# Altium PCB Motor PCB.PcbDoc
Units mil, origin at the board's own origin, x right, y up, seen from the top; angles counter-clockwise.
Board outline 629.96 x 1250 mil, 4 copper layers (Top Layer, Ground, Power, Bottom Layer), stack 29.8 mil thick; 19 components, 14 nets, 55 pads, 31 vias.
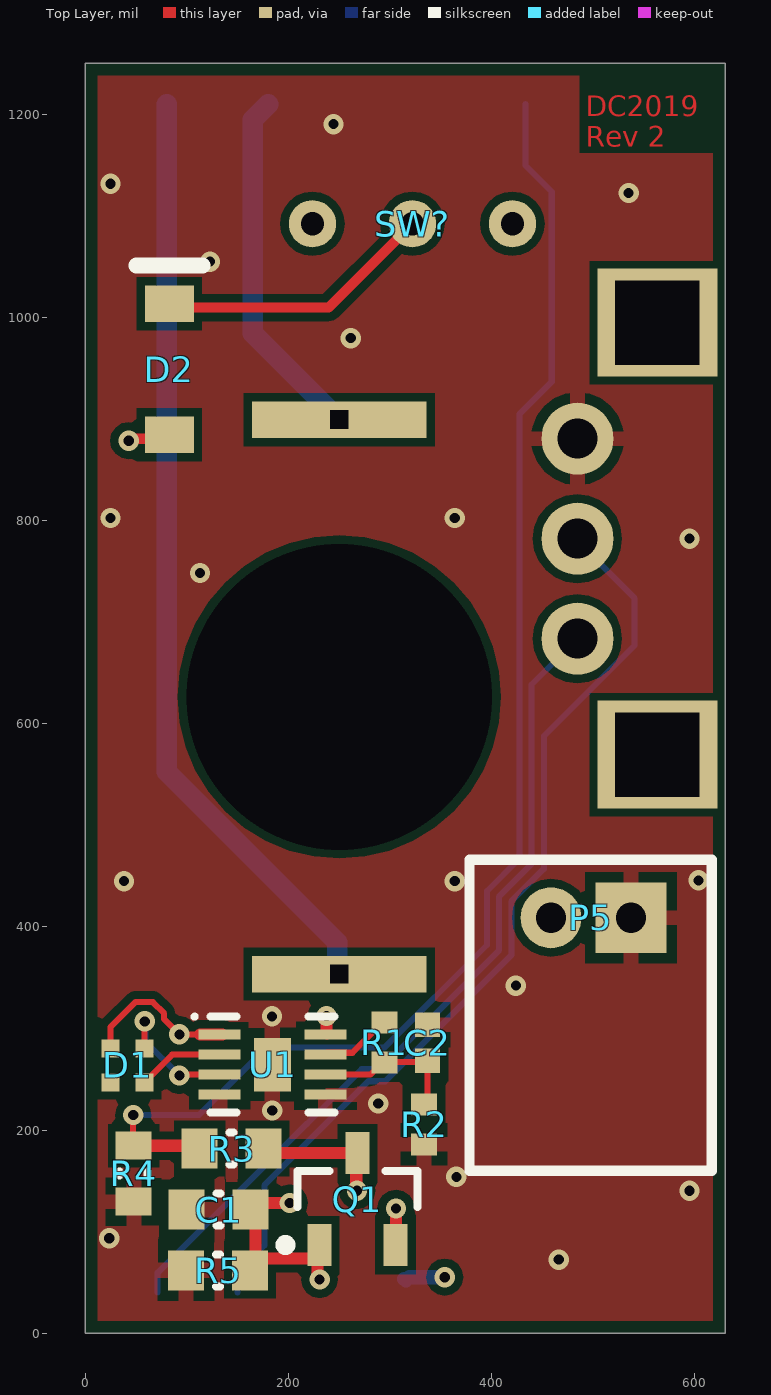
[diagram p0: Top Layer view]
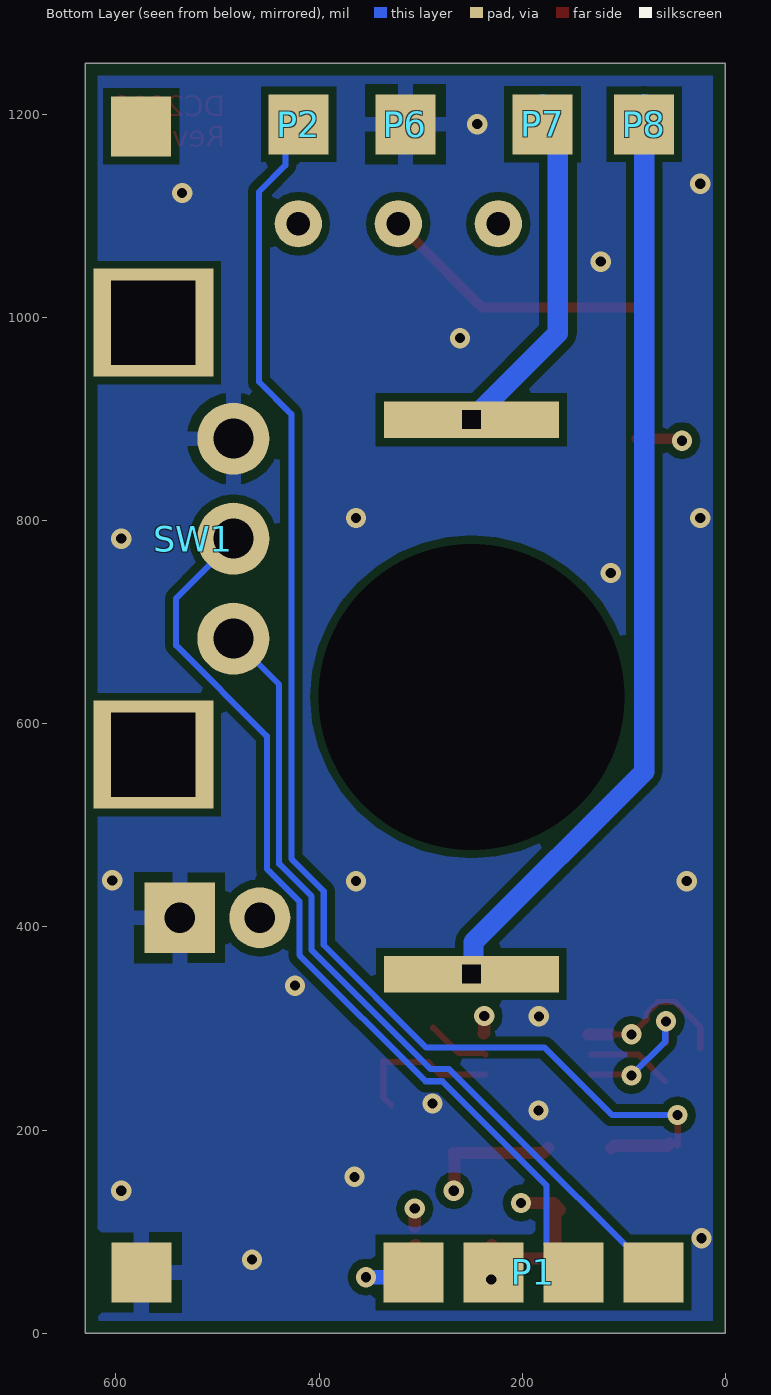
[diagram p1: Bottom Layer view, seen from below]
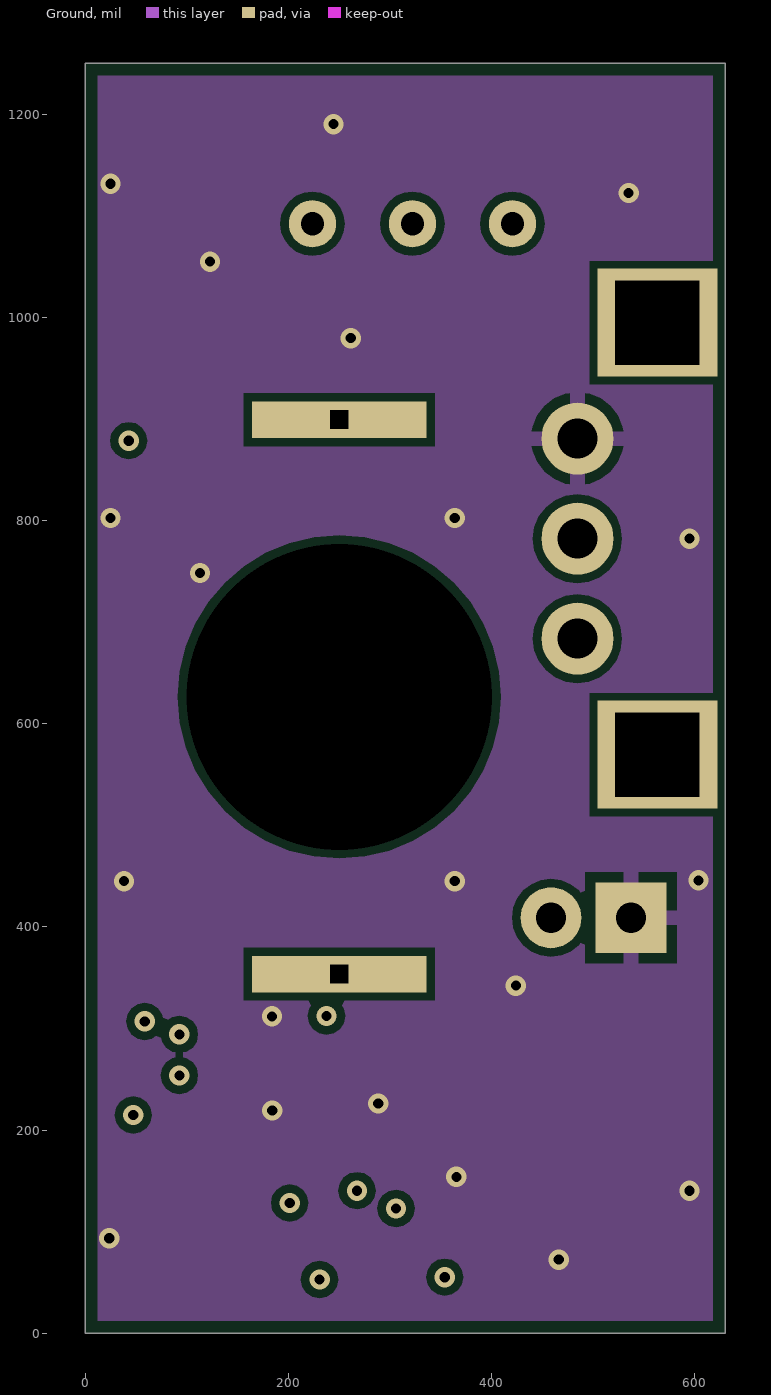
[diagram p2: Ground]
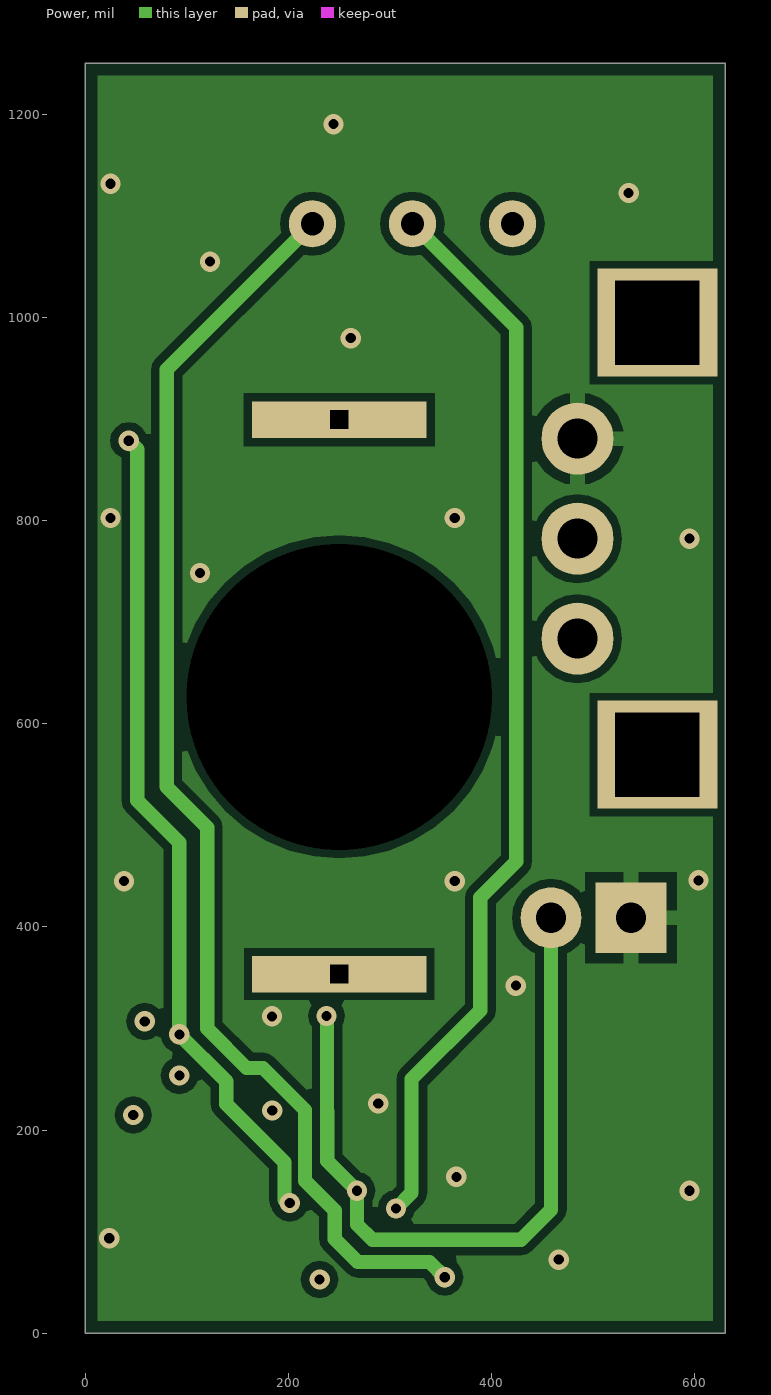
[diagram p3: Power]

## Layer stack, top to bottom
Top Solder: solder mask 0.4, Solder Resist, Dk 3.5
Top Layer: signal copper 1.4
Dielectric 2: prepreg 5.6, PP-006, Dk 4.1
Ground: signal copper 1.4
Dielectric 1: dielectric 13, FR-4, Dk 4.8
Power: signal copper 1.4
Dielectric 3: prepreg 5.6, PP-006, Dk 4.1
Bottom Layer: signal copper 1.4
Bottom Solder: solder mask 0.4, Solder Resist, Dk 3.5

## Board outline
0,0 0,1250 629.96,1250 629.96,0

## Design rules (kind name [scope] priority, off if disabled: settings)
BoardOutlineClearance [All] p1: gap=12 ignorepadtopadclearanceinfootprint=FALSE
Clearance [All] p1: gap=6 ignorepadtopadclearanceinfootprint=FALSE except(8: Arc-Fill Arc-Poly Arc-Region Track-Fill Track-Poly Track-Region SMDPad-Fill SMDPad-Poly SMDPad-Region THPad-Fill THPad-Poly THPad-Region Via-Fill Via-Poly Via-Region Fill-Fill Fill-Poly Fill-Region Poly-Poly Poly-Region Region-Region)
DiffPairsRouting [All] p1: maxlimit=10 minlimit=6 mostfreqgap=6 toplayer_minwidth=6 toplayer_maxwidth=15 toplayer_prefwidth=8 midlayer1_minwidth=6 midlayer1_maxwidth=15 midlayer1_prefwidth=8 midlayer2_minwidth=6 midlayer2_maxwidth=15 midlayer2_prefwidth=8 bottomlayer_minwidth=6 bottomlayer_maxwidth=15 bottomlayer_prefwidth=8 maxuncoupledlength=500
HoleSize [All] p1: absolutevalues=TRUE maxlimit=400 minlimit=7.87 maxpercent=80.000 minpercent=20.000
HoleToHoleClearance [All] p1: gap=18 allowstackedmicrovias=TRUE
MinimumAnnularRing [All] p1: minimumring=5
MinimumSolderMaskSliver [All] p1 off: minsoldermaskwidth=6
PlaneClearance [All] p1: clearance=12
PlaneConnect PlaneConnect_IsVia [IsVia] p1: planeconnectstyle=Direct reliefexpansion=20 reliefentries=4 reliefconductorwidth=10 reliefairgap=10
PlaneConnect [All] p2: planeconnectstyle=Relief reliefexpansion=20 reliefentries=4 reliefconductorwidth=15 reliefairgap=12
PolygonConnect PolygonConnect_IsVia [IsVia] p1: connectstyle=Direct reliefconductorwidth=10 reliefentries=4 polygonreliefangle="45 Angle" airgapwidth=10
PolygonConnect [All] p2: connectstyle=Relief reliefconductorwidth=15 reliefentries=4 polygonreliefangle="90 Angle" airgapwidth=10
RoutingVias [All] p1: holewidth=7.87 width=14.17 viastyle="Through Hole" minholewidth=7.87 minwidth=13.78 maxholewidth=28 maxwidth=50
SilkToSilkClearance [All] p1 off: silktosilkclearance=6
SilkToSolderMaskClearance [IsPad] p1 off: minsilkscreentomaskgap=6 clearancetoexposedcopper=TRUE
SolderMaskExpansion [Not IsVia] p1: expansion=4
Width [All] p1: maxlimit=50 minlimit=4 preferedwidth=6
22 further rules are at their usual default settings.

## Components (designator, comment, footprint, x,y, rotation, side; value= is the part's Value field where it differs from the comment)
C1 "CAP 1uF 16V 0603(1608)" CAPC0603(1608)100_N 131.21,121.77 r0 top value=1uF
C2 "CAP 100nF 6.3V 0402(1005)" CAPC0402(1005)60_N 336.73,286.07 r270 top value=100nF
D1 "0402 RGB LED" "0404 RGB LED" 41.51,263.75 r0 top
D2 "DSS16UTR" MCC-SOD-123FL_V 82.73,948.9 r90 top
P1 "4p SMD Pads" "4p SMD pad" 70.87,40.28 r90 bottom
P2 "1p SMD Pads" "1p SMD pad"#1 421.85,1217.38 r0 top
P5 "S2B-PH-K-S" S2B-PH-K-S 537.03,409.03 r180 top
P6 "1p SMD Pads" "1p SMD pad"#2 103.72,1160.26 r180 bottom
P7 "1p SMD Pads" "1p SMD pad"#3 400.62,1155.85 r0 top
P8 "1p SMD Pads" "1p SMD pad"#4 59.21,1187.68 r0 top
Q1 "BSS314PE" INF-PG-SOT23_N 267.74,132.25 r90 top
R1 "Jumper 0402(1005)" RESC0402(1005)_N 294.31,286.08 r270 top value="0.00 Ohm"
R2 "Jumper 0402(1005)" RESC0402(1005)_N 333.38,205.74 r90 top value="0.00 Ohm"
R3 "100K 5% 0603(1608)" RESC0603(1608)_N 144.02,181.94 r180 top value="100000.00 Ohm"
R4 "360K 5% 0603(1608)" RESC0603(1608)_L 47.55,157.16 r90 top value="360000.00 Ohm"
R5 "1M 5% 0603(1608)" RESC0603(1608)_N 130.54,61.8 r0 top value="1000000.00 Ohm"
SW1 "9mm Encoder" "9mm encoder" 484.36,782.2 r90 bottom locked
SW? "SS12D00" "DC2019 Switch" 420.35,1092.13 r180 top
U1 "MC34674AEP/R2" SON50P300X65_HS-9N 184.23,264.44 r0 top

## Footprints (in the part's own frame and the unit in brackets; to place one, negate y for a bottom-side part, rotate by r counter-clockwise, add the part's x,y. Pads: shape width x height; smd on the part's side, far side on the other; paste and mask are expansions set on the pad)
"1p SMD pad"#1 [mm]
  rect 1.5x1.5 smd far side: 1(-0.046,-0.696)
"1p SMD pad"#2 [mm]
  rect 1.5x1.5 smd: 1(-5.365,0.755)
"1p SMD pad"#3 [mm]
  rect 1.5x1.5 smd far side: 1(-5.605,0.867)
"1p SMD pad"#4 [mm]
  rect 1.5x1.5 smd far side: 1(0.527,0.059)
"4p SMD pad" [mm]
  rect 1.5x1.5 smd: 1(0.501,0) 2(0.501,2) 3(0.501,4) 4(0.501,6)
"9mm encoder" [mm]
  round 1.8 hole 1: 1(-2.5,0) 2(0,0) 3(2.5,0)
  rect 2.7x3 hole 2.1 square: 5(-5.4,2) 5(5.4,2)
  body extent -5.75,-1.63 5.75,4.47, height 12.57
"0404 RGB LED" [mm] "0404 RGB LED"
  rect 0.45x0.45 smd: 1(-0.425,0.425) 2(0.425,0.425) 3(0.425,-0.425) 4(-0.425,-0.425)
  body extent -0.5,-0.5 0.5,0.5, height 0.52
CAPC0402(1005)60_N [mm] "Chip Capacitor, Body 1.0x0.5mm, Height 0.6mm, IPC Medium Density"
  rect 0.62x0.62 smd: 1(-0.45,0) 2(0.45,0)
  body extent -0.55,-0.3 0.55,0.3, height 0.6
CAPC0603(1608)100_N [mm] "Chip Capacitor, Body 1.6x0.8mm, Height 1.0mm, IPC Medium Density"
  rect 0.9x1 smd: 1(-0.8,0) 2(0.8,0)
  silkscreen extent -0.05,-0.4 0.05,0.4, body extent -0.87,-0.48 0.88,0.47, height 1
"DC2019 Switch" [mm]
  round 1.183 hole 0.583: 1(0,0) 2(2.5,0) 3(5,0)
  body extent -1.75,-1.85 6.75,1.85, height 3.5
INF-PG-SOT23_N [mm] "SOT23, 3-Leads, Body 2.9x1.3mm, Pitch 0.95mm, IPC Medium Density"
  rect 1.05x0.6 smd: 1(-1.15,0.95) 2(-1.15,-0.95) 3(1.15,0)
  silkscreen extent -1.27,-1.5 0.7,1.92, body extent -0.7,-1.5 0.7,1.5, height 1.1
MCC-SOD-123FL_V [mil] "SODFL, 2-Leads, Body 3.1x1.9mm"
  rect 36x48 smd: 1(-64.5,0) 2(64.5,0)
  silkscreen extent 102,-32 102,32, body extent -73,-37 73,37, height 47
RESC0402(1005)_N [mm] "Chip Resistor, Body 1.0x0.5mm, IPC Medium Density"
  rect 0.55x0.65 smd: 1(-0.5,0) 2(0.5,0)
  body extent -0.52,-0.27 0.53,0.28, height 0.4
RESC0603(1608)_L [mm] "Chip Resistor, Body 1.6x0.8mm, IPC High Density"
  rect 0.7x0.9 smd: 1(-0.7,0) 2(0.7,0)
  silkscreen extent -0.05,-0.35 0.05,0.35, body extent -0.85,-0.47 0.85,0.47, height 0.6
RESC0603(1608)_N [mm] "Chip Resistor, Body 1.6x0.8mm, IPC Medium Density"
  rect 0.9x1 smd: 1(-0.8,0) 2(0.8,0)
  silkscreen extent -0.05,-0.4 0.05,0.4, body extent -0.85,-0.47 0.85,0.47, height 0.6
S2B-PH-K-S [mil] "JST Right Angle 2 Ckt"
  rect 69.61x69.61 hole 30: 1(0,0)
  round 60 hole 30: 2(78.74,0)
  silkscreen extent -80,-57 159,249, body extent -77,-53 156,246, height 190
SON50P300X65_HS-9N [mm] "SON, 8-Leads, Body 2.00x3.00mm, Pitch 0.50mm, Thermal Pad 1.33x0.93mm, IPC Medium Density"
  rect 1.05x0.25 smd paste-0.012: 1(-1.32,0.75) 2(-1.32,0.25) 3(-1.32,-0.25) 4(-1.32,-0.75) 5(1.32,-0.75) 6(1.32,-0.25) 7(1.32,0.25) 8(1.32,0.75)
  rect 0.93x1.33 smd paste-0.012: 9(0,0)
  silkscreen extent -2,-1.2 1.55,1.25, body extent -1.55,-1.05 1.55,1.05, height 0.65

## Part data
C1: library part CMP-1035-02736-1, "CAP 1uF 16V ±5% 0603 (1608 Metric) Thickness 1mm SMD", Case-EIA=0603, Case-Metric=1608, Rated Voltage="16 V", Tolerance=±5%, Max Thickness="1 mm", Technology=SMT
C2: library part CMP-1034-02061-1, "CAP 100nF 6.3V ±10% 0402 (1005 Metric) Thickness 0.6mm SMD", Case-EIA=0402, Case-Metric=1005, Rated Voltage="6.3 V", Tolerance=±10%, Max Thickness="0.6 mm", Technology=SMT
D2: library part CMP-2000-07084-1, "SCHOTTKY 60V SOD-123FL", Forward Current If(AV)=1A, Forward Surge Current Ifsm Max=30A, Forward Voltage VF Max=1.1V, Manufacturer="Micro Commercial Components", Package Description="2-Pin Small Outline Diode, Flat Lead, Body 2.825 x 1.65 mm", Package Reference=SOD-123FL, Repetitive Reverse Voltage Vrrm Max=1kV, Datasheet URL=http://www.mccsemi.com/up_pdf/SM4001PL-SM4007PL(SOD-123FL).PDF, Datasheet Version="Rev. H, 05/2015", Diode Configuration=Single, Diode Type=StandardRecovery, Manufacturer URL=http://www.mccsemi.com/, Mounting Technology=SurfaceMount
P1: library part "4p SMD"
P2 P6 P7 P8: library part "1p SMD"
P5: "JST Right-Angle 2 ckt"
Q1: library part CMP-1099-00027-1, "P-Channel OptiMOS P3 Small-Signal-Transistor, -30 V VDS, -1.5 A ID, -55 to 150 degC, PG-SOT23, Reel, Green", Manufacturer=Infineon, ComponentLink1Description="Manufacturer URL", ComponentLink1URL=http://www.infineon.com/, ComponentLink2Description=Datasheet, ComponentLink2URL=http://www.infineon.com/dgdl/BSS314PE_rev2.3.pdf?folderId=db3a304314dca38901154a72e3951a65&fileId=db3a304330f68606013109b696aa0084, ComponentLink3Description="Package Specification", ComponentLink3URL=http://www.infineon.com/dgdl/SOT23-Package_Overview.pdf?folderId=db3a30431936bc4b0119532290053c66&fileId=db3a30431936bc4b0119533468123c85, DatasheetVersion="Rev. 2.3", Green=TRUE, Halogen-free=TRUE, ID (max)="-1.5 A", IDpuls (max)="-6.1 A", Mounting Technology="Surface Mount", PackageDescription="3-Pin Small Outline Transistor Package, 2.9 x 1.3 mm Body, 0.95 mm Pitch", PackageReference=PG-SOT23, PackageVersion=Apr-08, Packing=Reel, PartNumber=BSS314PE, Pto t (max)="0.5 W", QG="-2.9 nC", RDS (on) (max)="140 mOhm", RDS (on) (max) (@4.5V)="230 mOhm", Rth="250 K/W", VDS (max)="-30 V", VGS(th) (max)="-2 V", VGS(th) (min)="-1 V"
R1 R2: library part CMP-1011-00001-1, "Jumper 0402 (1005 Metric)", Case-EIA=0402, Case-Metric=1005, Power=None, Technology=SMT, Tolerance=None
R3: library part CMP-1012-00122-1, "100K 0.1W 5% 0603 (1608 Metric)  SMD", Case-EIA=0603, Case-Metric=1608, Power="0.1 W", Tolerance="5 %", Technology=SMT
R4: library part CMP-1012-00135-1, "360K 0.1W 5% 0603 (1608 Metric)  SMD", Case-EIA=0603, Case-Metric=1608, Power="0.1 W", Tolerance="5 %", Technology=SMT
R5: library part CMP-1012-00146-1, "1M 0.1W 5% 0603 (1608 Metric)  SMD", Case-EIA=0603, Case-Metric=1608, Power="0.1 W", Tolerance="5 %", Technology=SMT
SW?: library part "DC2019 Switch"
U1: "High Input Voltage 1.05A Charger for Single-cell Li-Ion Batteries"

## Free pads (board coordinates)
  rect 172x36 hole 18 square: 1(249.95,899.35) 2(249.95,353.65)
  round 60 hole 301: 4(249.95,626.45)
  rect 59.06x59.06 smd far side: 5(574.8,60) 5(575,1188)

## Via types
v1: diameter 20, hole 10, Top Layer to Bottom Layer, tented both sides, 31 vias

## Nets (pads, with @x,y where several pads share a name; then routed paths per layer and width w, separated by ;. In a path a pad name is that pad's centre, name@x,y a point inside that pad or via, vN(x,y) a via of type N, cw(c..) or ccw(c..) an arc to the next point about the centre after c; other vN are vias at no path point)
BAT_CHG: P5.2 Q1.3 R3.1 U1.8 | length 865.4
  Top Layer w12: R3.1@174.33,182.64 179.45,177.52 Q1.3 266.63,176.41 266.63,141.21 v1(267.4,140.44) ; v1@237.31,314.71 v1(237.31,312.4) 237.31,295.65 U1.8@237.92,295.05
  Power w14: v1@237.78,309.62 237.92,309.48 237.92,259.91 ; 237.89,218.56 237.89,259.94 ; 238.06,218.56 238.06,169.78 v1(267.4,140.44) ; v1@266.01,140.67 267.4,139.29 267.4,107.26 282.5,92.16 428.77,92.16 458.29,121.68 P5.2
BAT_MON: P2.1 R3.2 R4.2 | length 1372.3
  Top Layer w6: v1(47.13,214.89) 46.91,214.67 46.91,185.35 R4.2
  Top Layer w12: R4.2@54.9,186.91 57.09,184.72 109.75,184.72 R3.2
  Bottom Layer w6: v1(47.13,214.89) 111.57,214.89 177.98,281.3 294.33,281.3 395.29,382.27 395.29,435.13 427.24,467.07 427.24,904.83 459.06,936.65 459.06,1123.57 433.07,1149.56 P2.1@433.07,1209.72
GND: C1.1 C2.1 P5.1 P6.1 pad.5@574.8,60 R2.1 R4.1 R5.1 SW1.3 U1.4 U1.5 U1.9
  other v1: 465.91,72.54 23.53,93.69 594.58,140.44 365.14,154.06 183.99,219.42 288.22,226.25 183.6,312.04 423.7,342.23 38.09,445.1 363.6,445.1 603.49,445.89 112.79,748.34 594.58,782.2 24.78,802.6 363.6,802.6 261.26,979.56 122.67,1054.9 534.71,1122.43 24.78,1131.5 244.24,1190.18
MOTOR_OUT_A: P7.1 pad.1 | length 351.8
  Bottom Layer w20: P7.1@179.96,1209.72 164.9,1194.66 164.9,984.4 pad.1
MOTOR_OUT_B: P8.1 pad.2 | length 926.5
  Bottom Layer w20: P8.1@79.96,1209.72 P8.1 79.96,552.89 248.03,384.82 248.03,355.46 249.84,353.65 pad.2
NetC2_2: C2.2 R1.2 R2.2 U1.6 | length 151.6
  Top Layer w6: U1.6 280.54,254.6 290.6,264.65 R1.2@290.6,265.8 ; R1.2@292.46,267.28 335.66,267.28 C2.2 336.73,231.94 R2.2@329.11,224.31
NetD1_2: D1.2 U1.3 | length 128.8
  Top Layer w6: v1(58.44,307.09) 58.34,307 58.34,286.34 58.61,286.07 D1.2@58.81,286.07 ; v1(92.48,253.89) 97.13,253.89 97.84,254.6 U1.3
  Bottom Layer w6: v1(58.44,307.09) 59.18,306.35 59.18,287.19 v1(92.48,253.89)
NetD1_3: D1.3 U1.2 | length 83.5
  Top Layer w6: D1.3@59.55,248.33 85.51,274.28 U1.2
NetP1_4: P1.4 SW?.3 | length 1305.5
  Power w14: SW?.3 80.02,948.65 80.02,537.91 119.92,498.01 119.92,299.99 158.67,261.23 174.7,261.23 216.08,219.85 216.08,150.19 245.4,120.88 245.4,92.91 268.04,70.27 338.75,70.27 v1(353.71,55.31) v1@353.71,52.15
  Bottom Layer w14: P1.4@313.9,53.64 315.62,51.92 319.01,55.31 v1(353.71,55.31)
NetR1_1: R1.1 U1.7 | length 62.4
  Top Layer w6: U1.7 238.12,276.2 262.78,276.2 287.34,300.77 R1.1@287.62,300.77
UI_ENC_SIGA: P1.2 SW1.2 | length 931.2
  Bottom Layer w6: P1.2@149.61,40.28 P1.2 176.13,86.53 176.13,145.65 278.64,248.16 295.13,248.16 419.29,372.33 419.29,425.19 451.24,457.13 451.24,587.81 540.57,677.14 540.57,723.46 490.38,773.65 SW1.2@490.38,779.07
UI_ENC_SIGB: P1.1 SW1.1 | length 821.1
  Bottom Layer w6: P1.1@70.87,40.28 P1.1 71.72,60 218.03,206.31 218.16,206.31 272.01,260.16 290.16,260.16 407.29,377.3 407.29,430.16 439.24,462.1 439.24,638.65 SW1.1@480.88,680.3
VBAT: D2.2 Q1.2 SW?.2 | length 1335.3
  Top Layer w10: D2.2@87.4,1009.58 239.37,1009.58 SW?.2@311.31,1081.52
  Top Layer w12: Q1.2@304.66,86.49 Q1.2 305.24,86.87 Q1.2@305.24,86.97 ; Q1.2@305.76,104.68 v1(305.76,122.95)
  Power w14: v1(305.76,122.95) 321.12,138.31 321.12,250.25 388.71,317.83 388.71,428.98 424.1,464.38 424.1,989.95 SW?.2
  Bottom Layer w12: v1(305.76,122.95) v1@307.09,124.28
VUSB: C1.2 D1.1 D2.1 P1.3 Q1.1 R5.2 U1.1 | length 1219.5
  Top Layer w6: D1.1 24.78,301.65 49.22,326.09 66.31,326.09 77.44,314.96 77.44,309.32 v1(92.48,294.28) U1.1@113.15,294.28
  Top Layer w10: v1(42.66,878.59) 43.46,879.39 47.21,879.39 48.4,880.58 D2.1@87.4,880.58 ; v1@229.62,52.01 v1@229.62,53.83 ; v1(230.53,52.95) v1@232.45,51.04 ; v1@232.45,50.09 v1@232.45,51.04 ; v1@232.45,51.54 v1@232.45,51.04
  Top Layer w12: U1.1@113.15,294.28 U1.1@134.98,294.28 ; C1.2 169.33,128.39 v1(201.12,128.39) ; C1.2@167.36,119.88 167.36,64.2 R5.2@167.46,64.1 ; R5.2@168.78,67.36 175.17,73.75 Q1.1@228.62,73.75 ; v1@229.62,53.83 v1(230.53,52.95) 229.62,52.01 228.62,51.01 Q1.1@228.62,73.75 ; Q1.1 228.62,85.26 Q1.1@228.62,73.75
  Power w14: v1(42.66,878.59) 51.13,870.12 51.13,524.41 92.48,483.06 v1(92.48,294.28) 138.6,248.16 138.6,230.24 ; 138.6,229.44 138.6,225.84 196.08,168.36 v1@196.08,131.57
pads on no net: D1.4 SW1.5 SW?.1

## Polygon pours and split planes (outlines as drawn)
GND on Bottom Layer "Bottom Layer-GND" (solid, remove dead copper, pour order 0): -0.24,-0.24 0,1297.35 689.58,1297.35 689.58,-0.24
GND on Ground "Ground-GND" (solid, remove dead copper, pour order 4): -0.25,-0.25 -0.01,1297.34 689.57,1297.34 689.57,-0.25
GND on Top Layer "Top Layer-GND" (solid, remove dead copper, pour order 6): -0.25,-0.25 -0.01,1297.34 689.57,1297.34 689.57,-0.25
GND on Power "Power-GND" (solid, remove dead copper, pour order 2): -0.24,-0.24 -0.01,1238.7 689.57,1238.7 689.57,-0.24

## Other copper
Top Layer:
  text "DC2019 / Rev 2" at 492.28,1167.73 h20

## Silkscreen, mask and mechanical layers (free items; w line width, h text height)
Mechanical 1:
  circle w0.5: c250,626.5 r150.39
  lines w0.5: 210.63,347.74 210.63,359.55 289.37,359.55 289.37,347.74 210.63,347.74 ; 210.63,893.45 210.63,905.26 289.37,905.26 289.37,893.45 210.63,893.45
Mechanical 2:
  circle w0.5: c250,626.5 r150.39
  lines w0.5: 0,0 629.96,0 629.96,1250 0,1250 0,0 ; 210.63,347.74 210.63,359.55 289.37,359.55 289.37,347.74 210.63,347.74 ; 210.63,893.45 210.63,905.26 289.37,905.26 289.37,893.45 210.63,893.45